# Allegro board MCF8316A_V10_211228.brd
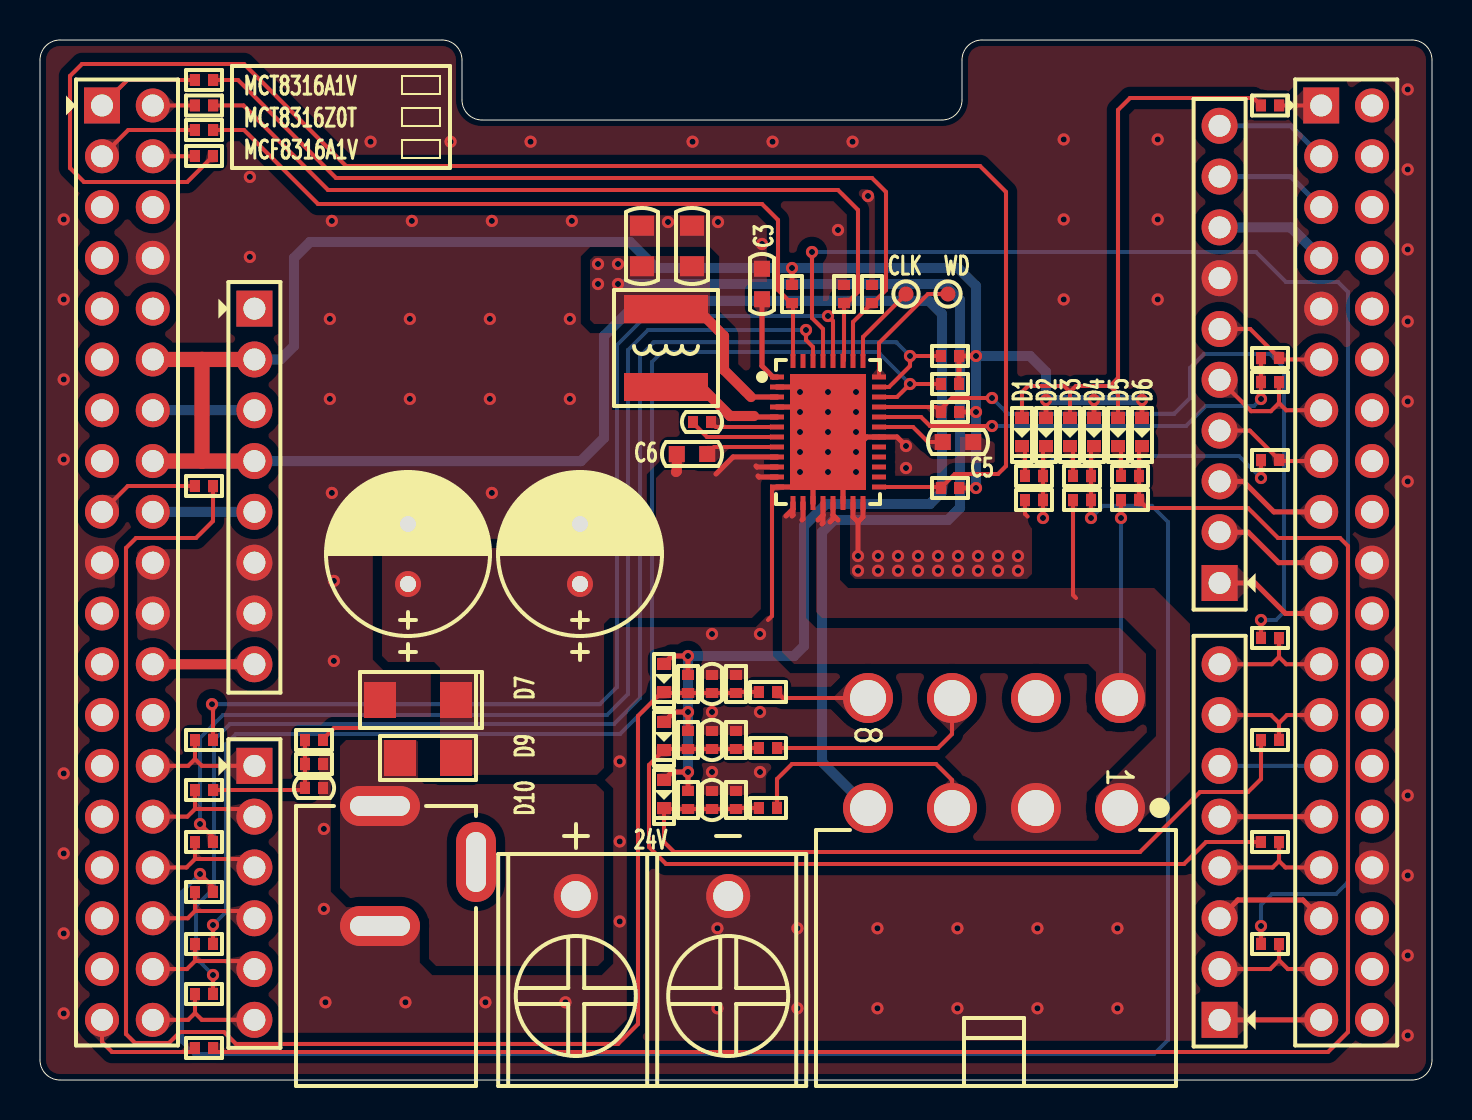
[diagram p0: board, top side]
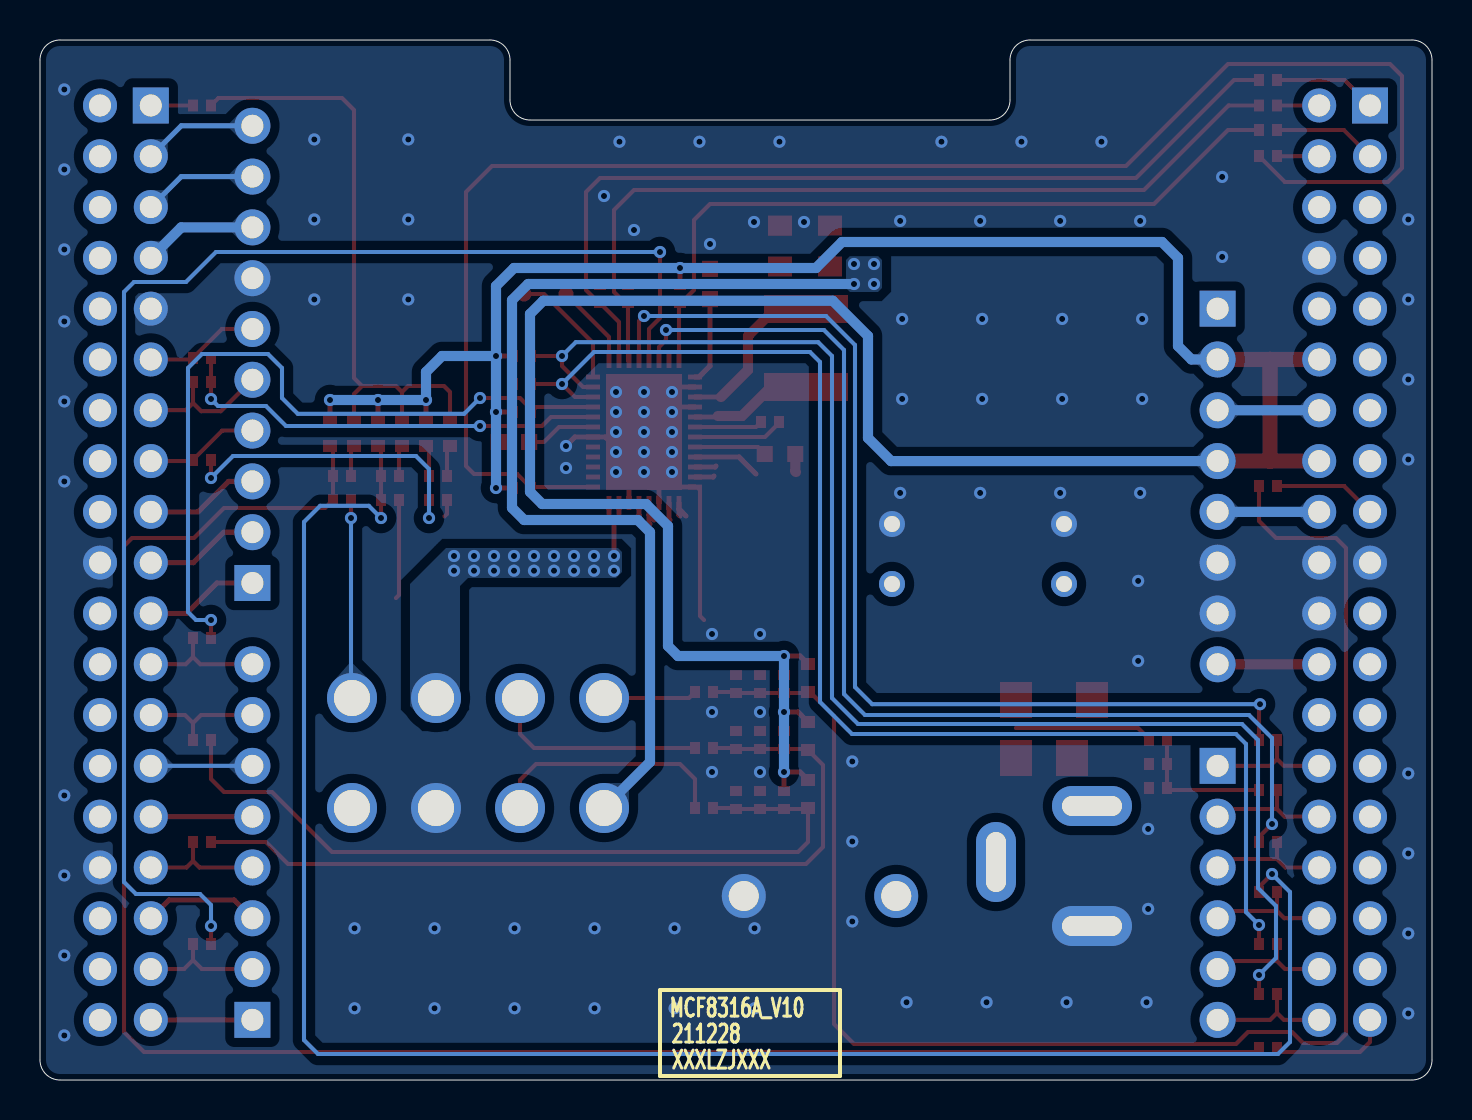
[diagram p1: board, bottom side, seen from below]

Outline 69.6 x 52 mm; copper layers: TOP, BOTTOM. Coordinates in mm from the lower left corner of the outline.
Outline path: 0,51 arc(0.29,51.71) 1,52 20.1,52 arc(20.81,51.71) 21.1,51 21.1,49 arc(21.39,48.29) 22.1,48 45.1,48 arc(45.81,48.29) 46.1,49 46.1,51 arc(46.39,51.71) 47.1,52 68.6,52 arc(69.31,51.71) 69.6,51 69.6,1 arc(69.31,0.29) 68.6,0 1,0 arc(0.29,0.29) 0,1 0,51

## Design rules (mm)
constraint set DEFAULT: min track width 0.203, pair gap 0.203

## Placement (name value [footprint] x y rotation side)
C1  10uF_25V  [C0805]  30.1 41.7 90 top
C2  10uF_25V  [C0805]  32.6 41.7 90 top
C3  1uF_50V  [C0603]  36.1 39.8 90 top
C4  47nF_50V  [C0402]  33.1 32.9 180 top
C5  1uF_50V  [C0603]  45.9 31.9 180 top
C6  1uF_50V  [C0603]  32.6 31.3 180 top
C7  100uF_50V  [CAP-3R0-8X12]  18.4 26.3 90 top
C8  100uF_50V  [CAP-3R0-8X12]  27 26.3 90 top
C9  10pF_50V  [C0402]  33.6 19.8 90 top
C10  10pF_50V  [C0402]  33.6 17 90 top
C11  10pF_50V  [C0402]  13.7 14.6 0 top
C12  10pF_50V  [C0402]  33.6 14 90 top
D1  LRB521S-40T1G  [SOD523]  49.1 32.4 90 top
D2  LRB521S-40T1G  [SOD523]  50.3 32.4 90 top
D3  LRB521S-40T1G  [SOD523]  51.5 32.4 90 top
D4  LRB521S-40T1G  [SOD523]  52.7 32.4 90 top
D5  LRB521S-40T1G  [SOD523]  53.9 32.4 90 top
D6  LRB521S-40T1G  [SOD523]  55.1 32.4 90 top
D7  LRB521S-40T1G  [SOD523]  31.2 20.1 90 top
D8  SS56F  [SMAF]  18.9 19 0 top
D9  LRB521S-40T1G  [SOD523]  31.2 17.2 90 top
D10  LRB521S-40T1G  [SOD523]  31.2 14.3 90 top
DC1  -  [DC005]  17 7.7 90 top
F1  0469005.WR  [FUSE1206]  19.4 16.1 0 top
J1  -  [CN1X10-2P54-Z]  58.98 24.85 90 top
J2  -  [CN1X8-2P54-Z]  10.72 38.57 270 top
J3  -  [CN2X19-2P54-Z]  3.1 48.73 270 top
J4  -  [CN2X19-2P54-Z]  64.06 48.73 270 top
J5  -  [CN1X8-2P54-Z]  58.98 3.01 90 top
J6  -  [CN1X6-2P54-Z]  10.72 15.71 270 top
J7  -  [HX42003-8WAF]  47.7 13.6 270 top
J8  KF7.62-2P  [KF7R62-2P]  30.6 9.2 180 top
L1  SWPA5020S470  [L5020]  31.3 36.6 270 top
NOREF  -  []  0 0 0 top
NOREF#2  -  []  0 0 90 top
R1  0R  [R0402]  8.2 50 180 top
R2  0R  [R0402]  8.2 48.73 180 top
R3  0R  [R0402]  61.5 48.73 0 top
R4  0R  [R0402]  8.2 47.5 180 top
R5  0R  [R0402]  8.2 46.2 180 top
R6  4.7K  [R0402]  37.6 39.3 270 top
R7  10K  [R0402]  40.2 39.3 90 top
R8  10K  [R0402]  41.6 39.3 90 top
R9  4.7K  [R0402]  45.5 36.2 180 top
R10  0R  [R0402]  61.5 36.1 0 top
R11  0R/NI  [R0402]  61.5 34.9 0 top
R12  4.7K  [R0402]  45.5 34.8 180 top
R13  4.7K  [R0402]  45.5 33.4 180 top
R14  0R  [R0402]  61.5 31 0 top
R15  2.2K  [R0402]  49.7 30.2 180 top
R16  2.2K  [R0402]  52.1 30.2 180 top
R17  2.2K  [R0402]  54.5 30.2 180 top
R18  0R  [R0402]  8.2 29.7 180 top
R19  4.7K  [R0402]  45.5 29.6 180 top
R20  10K  [R0402]  49.7 29 0 top
R21  10K  [R0402]  52.1 29 0 top
R22  10K  [R0402]  54.5 29 0 top
R23  0R  [R0402]  61.5 22.1 0 top
R24  10K  [R0402]  32.4 19.8 90 top
R25  4.7K/NI  [R0402]  34.8 19.8 270 top
R26  1.8K  [R0402]  36.4 19.4 180 top
R27  0R  [R0402]  8.2 17 180 top
R28  200K  [R0402]  13.7 17 0 top
R29  10K  [R0402]  32.4 17 90 top
R30  4.7K/NI  [R0402]  34.8 17 270 top
R31  0R  [R0402]  61.5 17 0 top
R32  1.8K  [R0402]  36.4 16.6 180 top
R33  10K  [R0402]  13.7 15.8 180 top
R34  0R  [R0402]  8.2 14.5 180 top
R35  10K  [R0402]  32.4 14 90 top
R36  4.7K/NI  [R0402]  34.8 14 270 top
R37  1.8K  [R0402]  36.4 13.6 180 top
R38  0R  [R0402]  8.2 11.9 180 top
R39  0R  [R0402]  61.5 11.9 0 top
R40  0R  [R0402]  8.2 9.4 180 top
R41  0R  [R0402]  8.2 6.8 180 top
R42  0R  [R0402]  61.5 6.8 0 top
R43  0R  [R0402]  8.2 4.3 180 top
R44  0R  [R0402]  8.2 1.6 180 top
TP1  TP/NI  [TP-0R75]  43.3 39.3 0 top
TP2  TP/NI  [TP-0R75]  45.4 39.3 0 top
U1  MCT8316A1VRGFR  [VQFN40-7R0X5R0X0R5-5R7X3R7]  39.4 32.4 0 top

## Library data of the parts
C1-C6 C9-C12 = CAP NP
C7 C8 = CAPT_100UF_3528_6r3V_10%_LXXXX
D1-D10 = DIODE13_9
DC1 = DC005
F1 = FUSE
J1 = CONN RCPT 10
J2 J5 = CONN RCPT 8
J3 J4 = CONN RCPT 19x2
J6 = CONN RCPT 6
J7 = HX30002-10A_1
J8 = CONN RCPT 2
L1 = INDUCTOR_0
R1-R44 = R_Generic
TP1 TP2 = TestPoint
U1 = MCT8316A1VRGFR

## Footprints (pads in the part's own frame, mm; a bottom-side part is the same pattern mirrored in y, then rotated)
C0402
  rect 0.5x0.6 smd: 1(-0.45,0) 2(0.45,0)
C0603
  rect 0.8x0.8 smd: 1(-0.762,0) 2(0.762,0)
C0805
  rect 1x1.2 smd: 1(-1.016,0) 2(1.016,0)
CAP-3R0-8X12
  round 1.3 hole 0.8: 1(-1.5,0) 2(1.5,0)
CN1X6-2P54-Z
  rect 1.8x1.8 hole 1.1: 1(0,0)
  round 1.8 hole 1.1: 2(2.54,0) 3(5.08,0) 4(7.62,0) 5(10.16,0) 6(12.7,0)
CN1X8-2P54-Z
  rect 1.8x1.8 hole 1.1: 1(0,0)
  round 1.8 hole 1.1: 2(2.54,0) 3(5.08,0) 4(7.62,0) 5(10.16,0) 6(12.7,0) 7(15.24,0) 8(17.78,0)
CN1X10-2P54-Z
  rect 1.8x1.8 hole 1.1: 1(0,0)
  round 1.8 hole 1.1: 2(2.54,0) 3(5.08,0) 4(7.62,0) 5(10.16,0) 6(12.7,0) 7(15.24,0) 8(17.78,0) 9(20.32,0) 10(22.86,0)
CN2X19-2P54-Z
  rect 1.8x1.8 hole 1.1: 1(0,0)
  round 1.7 hole 1.1: 2(0,2.54) 3(2.54,0) 4(2.54,2.54) 5(5.08,0) 6(5.08,2.54) 7(7.62,0) 8(7.62,2.54) 9(10.16,0) 10(10.16,2.54) 11(12.7,0) 12(12.7,2.54) 13(15.24,0) 14(15.24,2.54) 15(17.78,0) 16(17.78,2.54) 17(20.32,0) 18(20.32,2.54) 19(22.86,0) 20(22.86,2.54) 21(25.4,0) 22(25.4,2.54) 23(27.94,0) 24(27.94,2.54) 25(30.48,0) 26(30.48,2.54) 27(33.02,0) 28(33.02,2.54) 29(35.56,0) 30(35.56,2.54) 31(38.1,0) 32(38.1,2.54) 33(40.64,0) 34(40.64,2.54) 35(43.18,0) 36(43.18,2.54) 37(45.72,0) 38(45.72,2.54)
DC005
  oval 2x4 hole 1x3: 1(6,0) 2(0,0)
  oval 4x2 hole 3x1: 3(3.2,-4.8)
FUSE1206
  rect 1.6x1.8 smd: 1(-1.4,0) 2(1.4,0)
HX42003-8WAF
  round 2.5 hole 1.8: 1(0,6.3) 2(0,2.1) 3(0,-2.1) 4(0,-6.3) 5(-5.5,6.3) 6(-5.5,2.1) 7(-5.5,-2.1) 8(-5.5,-6.3)
KF7R62-2P
  round 2.2 hole 1.5: 1(-3.81,0) 2(3.81,0)
L5020
  rect 1.4x4.2 smd: 1(-1.95,0) 2(1.95,0)
R0402
  rect 0.5x0.6 smd: 1(-0.45,0) 2(0.45,0)
SMAF
  rect 1.6x1.8 smd: 1(-1.9,0) 2(1.9,0)
SOD523
  rect 0.6x0.7 smd: 1(-0.7,0) 2(0.7,0)
TP-0R75
  round 0.75 smd: 1(0,0)
VQFN40-7R0X5R0X0R5-5R7X3R7
  rect 0.7x0.25 smd: 1(-2.55,2.75) 2(-2.55,2.25) 3(-2.55,1.75) 4(-2.55,1.25) 5(-2.55,0.75) 6(-2.55,0.25) 7(-2.55,-0.25) 8(-2.55,-0.75) 9(-2.55,-1.25) 10(-2.55,-1.75) 11(-2.55,-2.25) 12(-2.55,-2.75) 21(2.55,-2.75) 22(2.55,-2.25) 23(2.55,-1.75) 24(2.55,-1.25) 25(2.55,-0.75) 26(2.55,-0.25) 27(2.55,0.25) 28(2.55,0.75) 29(2.55,1.25) 30(2.55,1.75) 31(2.55,2.25) 32(2.55,2.75)
  rect 0.25x0.7 smd: 13(-1.75,-3.55) 14(-1.25,-3.55) 15(-0.75,-3.55) 16(-0.25,-3.55) 17(0.25,-3.55) 18(0.75,-3.55) 19(1.25,-3.55) 20(1.75,-3.55) 33(1.75,3.55) 34(1.25,3.55) 35(0.75,3.55) 36(0.25,3.55) 37(-0.25,3.55) 38(-0.75,3.55) 39(-1.25,3.55) 40(-1.75,3.55)
  rect 3.8x5.8 smd: 41(0,0)

## Nets
+5V: J2.5 J3.18
AVDD: J1.8 J4.7
GND: C1.2 C2.2 C3.2 C5.1 C7.2 C8.2 C9.2 C10.2 C11.2 C12.2 D8.1 DC1.2 J1.7 J2.6 J2.7 J3.8 J3.19 J3.20 J3.22 J4.9 J4.20 J4.32 J7.2 J8.1 R7.2 R8.2 R25.1 R30.1 R33.1 R36.1 U1.2 U1.4 U1.12 U1.15 U1.18 U1.26 U1.41
VBUS: C11.1 R28.1 R33.2 R34.1
VCC_1.5V_DVDD: C3.1 U1.1
VCC_3.3V: D2.2(ANODE_2) D4.2(ANODE_2) D6.2(ANODE_2) D7.2(ANODE_2) D9.2(ANODE_2) D10.2(ANODE_2) J2.2 J2.4 J3.12 J3.16 R6.1 R9.1 R12.1 R13.1 R19.1 R24.2 R29.2 R35.2
VCC_3.3V_AVDD: C5.2 U1.27
VCC_5V_BK: C1.1 C2.1 J7.4 L1.1 U1.3
VCC_24V: C6.2 C7.1 C8.1 D8.2(ANODE_2) F1.2 R28.2 U1.9 U1.10 U1.11(VM_3)
VCC_24V_IN: DC1.1 F1.1 J8.2
VDD: J3.5
VIN: J2.8 J3.24
BEMF1: D6.1 R17.1 R22.2 R44.1
BEMF2: D4.1 R16.1 R21.2 R40.1
BEMF3: D2.1 R14.1 R15.1 R20.2
BOOT0: J3.7
BRAKE: R2.1 R7.1 U1.35
DACOUT1: R42.1 U1.37
DACOUT2: R38.1 U1.38
DACOUT2/SOX: R27.1 U1.36
DIR: R1.1 R8.1 U1.34
DRVOFF: R5.1 R19.2 U1.21
E5V: J3.6
EXT_CLK: TP1.1 U1.33
EXT_WD: TP2.1 U1.32
FG: R13.2 R23.1 U1.29
GPIO_BEMF: D1.2(ANODE_2) D3.2(ANODE_2) D5.2(ANODE_2) R3.1
H1: J7.8 R26.1
H2: J7.7 R32.1
H3: J7.3 R37.1
HALL_H1: C9.1 D7.1 R18.1 R24.1 R25.2 R26.2
HALL_H2: C10.1 D9.1 R29.1 R30.2 R32.2 R39.1
HALL_H3: C12.1 D10.1 R31.1 R35.1 R36.2 R37.2
MOTOR_U: J7.5 R22.1 U1.13 U1.14
MOTOR_V: J7.1 R21.1 U1.16 U1.17
MOTOR_W: J7.6 R20.1 U1.19 U1.20
NFAULT: R4.1 R6.2 U1.40
NRST: J2.3 J3.14
PA0: J3.28 J6.1 R27.2
PA1: J3.30 J6.2 R34.2
PA2: J4.35 J5.2 R42.2
PA3: J4.37 J5.1
PA4: J3.32 J6.3 R38.2
PA5: J1.6 J4.11 R10.2
PA6: J1.5 J4.13 R11.2
PA7: J1.4 J4.15 R14.2
PA8: J4.23 J5.8 R23.2
PA9: J1.1 J4.21
PA10: J4.33 J5.3
PA11: J4.14
PA12: J4.12
PA13: J3.13
PA14: J3.15
PA15: J3.17 R18.2
PB0: J3.34 J6.4 R40.2
PB1: J4.24
PB2: J4.22
PB3: J4.31 J5.4 R39.2
PB4: J4.27 J5.6
PB5: J4.29 J5.5
PB6: J1.3 J4.17
PB7: J3.21
PB8: J1.10 J4.3
PB9: J1.9 J4.5
PB10: J4.25 J5.7 R31.2
PB11: J4.18
PB12: J4.16
PB13: J4.30
PB14: J4.28
PB15: J4.26
PC0: J3.38 J6.6 R43.2
PC1: J3.36 J6.5 R41.2
PC2: J3.35
PC3: J3.37 R44.2
PC4: J4.34
PC5: J4.6
PC6: J4.4
PC7: J1.2 J4.19
PC8: J4.2
PC9: J4.1 R3.2
PC10: J3.1 R1.2
PC11: J3.2 R2.2
PC12: J3.3 R4.2
PC13: J3.23
PC14: J3.25
PC15: J3.27
PD2: J3.4 R5.2
PD8: J4.10
PF0: J3.29
PF1: J3.31
PF4: J4.38
PF5: J4.36
PF6: J3.9
PF7: J3.11
SCL: R9.2 R43.1 U1.31
SDA: R12.2 R41.1 U1.30
SPEED: R10.1 R11.1 U1.28
U5V: J4.8
VBAT/VLCD: J3.33
N17269667: C4.1 U1.6
N17269670: C4.2 U1.7
N17269727: C6.1 U1.8
N17270277: L1.2 U1.5
N17281076: D5.1 R17.2
N17281273: D3.1 R16.2
N17281452: D1.1 R15.2

Pads without a net: DC1 3; J2 1; J3 10 26; U1 22 23 24 25 39

## Via types
v1: diameter 0.61, hole 0.305, TOP to BOTTOM, 150 vias

## Routing (per net, layer and track width the routed paths; a pad name or vN(x,y) marks a point on that pad's centre or on a via; arc(x,y) is an arc through that point)
+5V: length 5.1
  BOTTOM w0.508: J3.18 J2.5
AVDD: length 5.7
  BOTTOM w0.508: J4.7 62.54,42.63 J1.8
GND: length 28.1
  TOP w0.203: 36.4,23 36.6,23.2 36.6,29.5 36.75,29.65 U1.12
  TOP w0.254: 39.65,32.15 40.15,31.65 U1.18 ; 39.65,32.15 v1(39.4,32.4) ; 39.65,32.15 40.26,32.15 40.57,31.84 41.03,31.84 41.34,32.15 U1.26 42.85,32.15 v1(43.3,31.7) ; U1.12 37.75,29.65 38.65,30.55 ; 38.65,30.55 U1.15 ; 38.65,30.55 38.65,31.65 v1(39.4,32.4) ; v1(39.4,32.4) 38.15,33.65 U1.4 ; v1(39.4,32.4) v1(39.4,33.4) 39.4,33.6 38.35,34.65 U1.2
  vias: v1(1.19,43.03) v1(1.19,39.03) v1(1.19,35.03) v1(1.19,31.03) v1(1.19,15.33) v1(1.19,11.33) v1(1.19,7.33) v1(1.19,3.33) v1(10.49,45.15) v1(10.49,41.15) v1(14.19,12.55) v1(14.19,8.55) v1(14.27,3.89) v1(14.49,38.05) v1(14.49,34.05) v1(14.59,42.95) v1(14.59,29.35) v1(14.69,24.95) v1(14.69,20.95) v1(16.53,46.91) v1(18.27,3.89) v1(18.49,38.05) v1(18.49,34.05) v1(18.59,42.95) v1(18.59,29.35) v1(20.53,46.91) v1(22.27,3.89) v1(22.49,38.05) v1(22.49,34.05) v1(22.59,42.95) v1(22.59,29.35) v1(24.53,46.91) v1(26.27,3.89) v1(26.49,38.05) v1(26.49,34.05) v1(26.59,42.95) v1(26.59,29.35) v1(28.99,15.93) v1(28.99,11.93) v1(28.99,7.93) v1(31.4,42.9) v1(32.63,46.91) v1(33.6,22.3) v1(33.6,18.4) v1(33.6,15.4) v1(33.9,42.9) v1(33.87,7.59) v1(33.87,3.59) v1(36,22.3) v1(36,18.4) v1(36,15.4) v1(36.1,41.8) v1(36.63,46.91) v1(37.87,7.59) v1(37.87,3.59) v1(38,34.4) v1(38,33.4) v1(38,32.4) v1(38,31.4) v1(38,30.4) v1(39.4,34.4) v1(39.4,31.4) v1(39.4,30.4) v1(39.9,42.5) v1(40.63,46.91) v1(40.8,34.4) v1(40.8,33.4) v1(40.8,32.4) v1(40.8,31.4) v1(40.8,30.4) v1(41.4,44.2) v1(41.87,7.59) v1(41.87,3.59) v1(43.3,30.6) v1(45.87,7.59) v1(45.87,3.59) v1(49.87,7.59) v1(49.87,3.59) v1(51.19,47.03) v1(51.19,43.03) v1(51.19,39.03) v1(53.87,7.59) v1(53.87,3.59) v1(55.89,47.03) v1(55.89,43.03) v1(55.89,39.03) v1(68.39,49.53) v1(68.39,45.53) v1(68.39,41.53) v1(68.39,37.93) v1(68.39,33.93) v1(68.39,29.93) v1(68.39,14.23) v1(68.39,10.23) v1(68.39,6.23) v1(68.39,2.23)
VBUS: length 7
  TOP w0.203: R28.1 R33.2 C11.1 13.15,14.5 R34.1
VCC_1.5V_DVDD: length 4.3
  TOP w0.254: U1.1 36.65,35.15 36.1,35.7 C3.1
VCC_3.3V: length 167.1
  TOP w0.254: R35.2 v1(32.4,15.4) 31.6,15.4 D10.2 ; v1(46.8,36.2) R9.1 R12.1 ; R29.2 v1(32.4,18.4) 31.7,18.4 D9.2 ; R19.1 v1(46.8,29.6) ; D2.2 v1(50.3,34) ; D6.2 v1(55.1,34) ; D4.2 v1(52.7,34) ; R13.1 v1(46.8,33.4) ; R24.2 v1(32.4,21.2) 31.6,21.2 D7.2 ; R6.1 v1(37.6,40.6)
  TOP w0.762: J3.12 8.1,36.03 ; 8.1,36.03 J2.2 ; 8.1,36.03 8.1,30.95 ; 8.1,30.95 J2.4 ; 8.1,30.95 J3.16
  BOTTOM w0.508: v1(46.8,36.2) 49.5,36.2 50.3,35.4 v1(50.3,34) v1(52.7,34) v1(55.1,34) ; v1(46.8,36.2) v1(46.8,33.4) v1(46.8,29.6) ; v1(46.8,36.2) 46.8,39.7 45.9,40.6 v1(37.6,40.6) 30.8,40.6 29.5,41.9 13.5,41.9 12.7,41.1 12.7,36.7 12.03,36.03 J2.2 ; v1(32.4,15.4) v1(32.4,18.4) v1(32.4,21.2) 37.7,21.2 38.2,21.7 38.2,27.7 39.3,28.8 44.49,28.8 45.1,29.41 45.1,38.3 44.44,38.96 29.96,38.96 28.2,37.2 28.2,32.1 27.05,30.95 J2.4
VCC_3.3V_AVDD: length 3.5
  TOP w0.203: C5.2 44.4,31.9 43.65,32.65 U1.27
VCC_5V_BK: length 58.3
  TOP w0.254: U1.3 35.55,34.15
  TOP w0.508: 35.55,34.15 34.2,35.5 34.2,37.2 32.9,38.5 31.35,38.5 L1.1
  BOTTOM w0.508: J7.4 39.1,15.9 39.1,27.39 39.71,28 45.39,28 46,28.61 46,38.99 45.19,39.8 v1(28.9,39.8)
  vias: v1(27.9,40.8) v1(27.9,39.8) v1(28.9,40.8)
VCC_24V: length 13.3
  TOP w0.203: 20.8,17.6 14.7,17.6 14.15,17.05 R28.2
  TOP w0.254: 35.9,30.2 35.95,30.15 U1.11 ; 35.8,30.7 35.85,30.65 U1.10 ; 33.8,30.3 34.65,31.15 U1.9
  TOP w0.508: C6.2 31.84,30.44 31.8,30.4
VIN: length 5.1
  TOP w0.508: J2.8 J3.24
BEMF1: length 95.7
  TOP w0.203: R44.1 8.85,1.4 64.4,1.4 65.4,2.4 65.4,26.7 65,27.1 61.9,27.1 60.4,28.6 55.35,28.6 R22.2 R17.1 54.95,31.55 D6.1
BEMF2: length 93.8
  TOP w0.203: v1(8,10.3) 8.65,9.65 R40.1 ; v1(52.55,28.1) R21.2 R16.1 52.55,31.55 D4.1
  BOTTOM w0.203: v1(8,10.3) 7.1,9.4 7.1,1.9 7.7,1.3 55.7,1.3 56.4,2 56.4,27.9 55.59,28.71 53.16,28.71 v1(52.55,28.1)
BEMF3: length 18.6
  TOP w0.203: v1(50.15,28.1) R20.2 R15.1 50.15,31.55 D2.1 ; R14.1 v1(61.05,30.1)
  BOTTOM w0.203: v1(50.15,28.1) 50.15,30.55 50.8,31.2 59.95,31.2 v1(61.05,30.1)
BRAKE: length 42.4
  TOP w0.203: R2.1 10.17,48.73 14.4,44.5 39.9,44.5 40.9,43.5 40.9,39.4 40.35,38.85 R7.1 40.2,36 U1.35
DACOUT1: length 69.6
  TOP w0.203: v1(38.6,41.4) 38.6,38.1 39.15,37.55 U1.37 ; R42.1 v1(61.05,7.7)
  BOTTOM w0.203: v1(38.6,41.4) 60.8,41.4 62.3,39.9 64.9,39.9 65.4,39.4 65.4,9.9 64.8,9.3 61.6,9.3 61.05,8.75 v1(61.05,7.7)
DACOUT2: length 56
  TOP w0.203: U1.38 38.65,36.65 38.3,37 v1(38.3,37.5) ; R38.1 8.65,12.15 v1(8,12.8)
  BOTTOM w0.203: v1(8,12.8) 8,17.1 9.15,18.25 28.35,18.25 29.4,19.3 29.4,36.5 30.4,37.5 v1(38.3,37.5)
DACOUT2/SOX: length 53
  TOP w0.203: U1.36 39.65,37.95 v1(39.4,38.2) ; R27.1 8.65,18.74 v1(8.6,18.79)
  BOTTOM w0.203: v1(39.4,38.2) 30.3,38.2 28.85,36.75 28.85,19.65 27.99,18.79 v1(8.6,18.79)
DIR: length 45.1
  TOP w0.203: U1.34 40.65,37.9 R8.1 41.65,38.85 42.3,39.5 42.3,44.4 41.6,45.1 14.8,45.1 9.9,50 R1.1
DRVOFF: length 82.8
  TOP w0.203: U1.21 45,29.65 R19.2 45.05,29.61 45.74,30.3 47.9,30.3 48.3,30.7 48.3,44.4 47,45.7 15.3,45.7 10.2,50.8 2.1,50.8 1.5,50.2 1.5,45.6 2.2,44.9 7.36,44.9 8.65,46.19 R5.1
EXT_CLK: length 4.2
  TOP w0.203: U1.33 41.15,37.15 TP1.1
EXT_WD: length 6.2
  TOP w0.203: U1.32 41.95,36.85 44.4,39.3 TP2.1
FG: length 37.9
  TOP w0.203: v1(47.6,34.1) 45.6,34.1 45.05,33.55 R13.2 44.8,33.65 U1.29 ; R23.1 v1(61.05,23)
  BOTTOM w0.203: v1(61.05,23) 61.8,23 62.2,23.4 62.2,35.6 61.5,36.3 58.2,36.3 57.5,35.6 57.5,34.1 56.71,33.31 48.39,33.31 v1(47.6,34.1)
GPIO_BEMF: length 30.7
  TOP w0.203: 53.5,34.7 51.8,34.7 51.5,34.4 ; 53.5,34.7 53.9,35.1 53.9,48.5 54.5,49.1 60.68,49.1 R3.1 ; 53.5,34.7 53.9,34.3 D5.2 ; D3.2 51.5,34.4 ; 51.5,34.4 51.2,34.7 49.4,34.7 49.1,34.4 D1.2
H1: length 4.7
  TOP w0.203: R26.1 37.15,19.1 J7.8
H2: length 10.8
  TOP w0.203: R32.1 44.9,16.6 45.6,17.3 J7.7
H3: length 12.2
  TOP w0.203: R37.1 36.85,15.05 37.6,15.8 44.8,15.8 45.6,15 J7.3
HALL_H1: length 79.6
  TOP w0.203: R26.2 34.85,19.4 R25.2 C9.1 R24.1 31.25,19.35 D7.1 31.1,19.4 29.9,18.2 29.9,2.8 28.9,1.8 9.8,1.8 9.2,2.4 7,2.4 6.45,1.85 4.75,1.85 4.3,2.3 4.3,26.6 4.8,27.1 7.8,27.1 8.65,27.95 R18.1
HALL_H2: length 41.4
  TOP w0.203: R39.1 58.3,11.9 57.2,10.8 31.3,10.8 30.45,11.65 30.45,15.75 D9.1 31.25,16.55 R29.1 C10.1 R30.2 34.85,16.6 R32.2
HALL_H3: length 40
  TOP w0.203: R37.2 34.85,13.6 R36.2 C12.1 R35.1 31.25,13.55 D10.1 31.2,11.9 31.7,11.4 55,11.4 58,14.4 60.4,14.4 61.05,15.05 R31.1
MOTOR_U: length 12
  TOP w0.203: R22.1 v1(54.05,28.1)
  TOP w0.254: U1.13 37.65,28.55 ; 37.65,28.55 37.3,28.2 ; 37.65,28.55 37.65,28.25 37.6,28.2 ; U1.14 38.15,28.05 38.1,28
  BOTTOM w0.203: v1(54.05,28.1) 54.05,19.15 J7.5
MOTOR_V: length 7.8
  TOP w0.203: 51.8,24.1 51.65,24.25 R21.1
  TOP w0.254: 39.1,27.8 39.15,27.85 39.15,28.25 ; U1.17 39.65,28.25 ; 39.65,28.25 39.65,28.05 39.5,27.9 ; 39.65,28.25 39.9,28 ; 39.15,28.25 38.9,28 ; 39.15,28.25 U1.16
MOTOR_W: length 4.7
  TOP w0.203: 49.38,28.18 49.25,28.3 R20.1
  TOP w0.254: v1(40.9,26.2) 40.9,27.9 ; 40.9,27.9 40.65,28.15 U1.19 ; 40.9,27.9 41.15,28.15 U1.20
  vias: v1(40.9,25.46) v1(41.9,26.2) v1(41.9,25.46) v1(42.9,26.2) v1(42.9,25.46) v1(43.9,26.2) v1(43.9,25.46) v1(44.9,26.2) v1(44.9,25.46) v1(45.9,26.2) v1(45.9,25.46) v1(46.9,26.2) v1(46.9,25.46) v1(47.9,26.2) v1(47.9,25.46) v1(48.9,26.2) v1(48.9,25.46)
NFAULT: length 37.5
  TOP w0.203: U1.40 37.65,38.8 R6.2 37.55,38.85 36.9,39.5 36.9,43 36.1,43.8 13.9,43.8 10.2,47.5 R4.1
NRST: length 5.1
  BOTTOM w0.508: J2.3 J3.14
PA0: length 6.3
  TOP w0.203: 7.75,16.05 7.41,15.71 J3.28 ; 7.75,16.05 R27.2 ; 7.75,16.05 8.09,15.71 J6.1
PA1: length 6.3
  TOP w0.203: 7.75,13.55 10.34,13.55 J6.2 ; 7.75,13.55 7.37,13.17 J3.30 ; 7.75,13.55 R34.2
PA2: length 6.3
  TOP w0.203: J4.35 62.39,5.55 61.95,5.99 ; 61.95,5.99 61.51,5.55 J5.2 ; 61.95,5.99 R42.2
PA3: length 5.1
  TOP w0.254: J5.1 J4.37
PA4: length 6.3
  TOP w0.203: 7.75,11.05 10.35,11.05 10.72,10.68 J6.3 ; 7.75,11.05 7.33,10.63 J3.32 ; 7.75,11.05 R38.2
PA5: length 5.7
  TOP w0.203: J1.6 60.51,37.55 61.95,36.11 R10.2 62.02,36.03 J4.11
PA6: length 7.1
  TOP w0.203: J1.5 58.99,35.01 60.56,33.44 61.54,33.44 61.95,33.85 ; 61.95,33.85 R11.2 ; 61.95,33.85 62.31,33.49 J4.13
PA7: length 5.7
  TOP w0.203: J1.4 60.49,32.47 61.95,31.01 R14.2 62,30.95 J4.15
PA8: length 6.3
  TOP w0.203: 61.95,21.15 61.59,20.79 J5.8 ; 61.95,21.15 R23.2 ; 61.95,21.15 62.31,20.79 J4.23
PA9: length 5.7
  TOP w0.254: J1.1 60.75,24.85 62.27,23.33 J4.21
PA10: length 5.8
  TOP w0.254: J5.3 59.89,9 63.15,9 J4.33
PA15: length 5.2
  TOP w0.203: R18.2 4.39,29.7 J3.17
PB0: length 6.3
  TOP w0.203: 7.75,8.45 R40.2 ; 7.75,8.45 7.39,8.09 J3.34 ; 7.75,8.45 10.36,8.45 J6.4
PB3: length 6.3
  TOP w0.203: J5.4 61.63,10.63 61.95,10.95 ; J4.31 62.27,10.63 61.95,10.95 ; 61.95,10.95 R39.2
PB4: length 5.1
  BOTTOM w0.203: J5.6 J4.27
PB5: length 5.1
  TOP w0.254: J5.5 J4.29
PB6: length 5.7
  TOP w0.254: J1.3 60.17,29.93 61.69,28.41 J4.17
PB8: length 5.7
  BOTTOM w0.254: J1.10 62.54,47.71 J4.3
PB9: length 5.7
  BOTTOM w0.254: J1.9 62.54,45.17 J4.5
PB10: length 6.3
  TOP w0.203: 61.95,17.85 62.35,18.25 J4.25 ; 61.95,17.85 61.55,18.25 J5.7 ; 61.95,17.85 R31.2
PC0: length 6.3
  TOP w0.203: J6.6 8.09,3.01 7.75,3.35 ; J3.38 7.41,3.01 7.75,3.35 ; 7.75,3.35 R43.2
PC1: length 6.3
  TOP w0.203: 7.75,5.95 7.35,5.55 J3.36 ; 7.75,5.95 10.32,5.95 J6.5 ; 7.75,5.95 R41.2
PC3: length 6
  TOP w0.203: R44.2 7.55,1.4 3.6,1.4 3.1,1.9 J3.37
PC7: length 5.7
  TOP w0.254: J1.2 60.41,27.39 61.93,25.87 J4.19
PC9: length 2.1
  TOP w0.203: R3.2 J4.1
PC10: length 5.2
  TOP w0.203: J3.1 4.37,50 R1.2
PC11: length 2.1
  TOP w0.203: R2.2 J3.2
PC12: length 5.2
  TOP w0.203: R4.2 4.41,47.5 J3.3
PD2: length 2.1
  TOP w0.203: R5.2 7.74,46.19 J3.4
SCL: length 70.8
  TOP w0.203: R9.2 v1(43.5,36.2) 43.5,35.7 42.45,34.65 U1.31 ; R43.1 v1(8.65,5.25)
  BOTTOM w0.203: v1(8.65,5.25) 7.8,6.1 7.8,8.7 8.7,9.6 8.7,17 9.5,17.8 28.7,17.8 30,19.1 30,36.2 30.69,36.89 42.81,36.89 v1(43.5,36.2)
SDA: length 66.6
  TOP w0.203: U1.30 42.85,34.15 v1(43.5,34.8) R12.2 ; R41.1 v1(8.65,7.75)
  BOTTOM w0.203: v1(43.5,34.8) 41.9,36.4 31.1,36.4 30.6,35.9 30.6,18.9 29,17.3 9.8,17.3 9.3,16.8 9.3,8.4 v1(8.65,7.75)
SPEED: length 21.9
  TOP w0.203: U1.28 44.05,33.15 44.5,32.7 v1(47.6,32.7) ; v1(61.05,34.05) R11.1 R10.1
  BOTTOM w0.203: v1(61.05,34.05) 60.7,33.7 58.3,33.7 57.3,32.7 v1(47.6,32.7)
N17269667: length 3.4
  TOP w0.203: C4.1 33.8,32.65 U1.6
N17269670: length 4.5
  TOP w0.203: U1.7 33.35,32.15 32.65,32.85 C4.2
N17269727: length 3.6
  TOP w0.203: U1.8 33.71,31.65 C6.1
N17270277: length 6.2
  TOP w0.254: U1.5 35.75,33.15 35.7,33.2
  TOP w0.508: L1.2 33.05,34.65 34.5,33.2 35.7,33.2
N17281076: length 1.6
  TOP w0.203: R17.2 54.05,31.55 D5.1
N17281273: length 1.6
  TOP w0.203: D3.1 51.65,31.55 R16.2
N17281452: length 1.6
  TOP w0.203: R15.2 49.25,31.55 D1.1

## Copper pours and planes (outline as drawn; the poured copper is in the pictures)
GND on TOP: 69.3,1 69.09,0.51 68.6,0.3 1,0.3 0.51,0.51 0.3,1 0.3,51 0.51,51.49 1,51.7 20.1,51.7 20.59,51.49 20.8,51 20.8,49 21.18,48.08 22.1,47.7 45.1,47.7 46.02,48.08 46.4,49 46.4,51 46.61,51.49 47.1,51.7 68.6,51.7 69.09,51.49 69.3,51 ; 49 cut-outs
GND on BOTTOM: 69.3,1 69.09,0.51 68.6,0.3 1,0.3 0.51,0.51 0.3,1 0.3,51 0.51,51.49 1,51.7 20.1,51.7 20.59,51.49 20.8,51 20.8,49 21.18,48.08 22.1,47.7 45.1,47.7 46.02,48.08 46.4,49 46.4,51 46.61,51.49 47.1,51.7 68.6,51.7 69.09,51.49 69.3,51 ; 35 cut-outs
VCC_5V_BK on TOP: 33.5,37.8 33.5,41 33.3,41.2 27.7,41.2 27.5,41 27.5,38 27.7,37.8
VCC_5V_BK on BOTTOM: 27.7,41.2 29.1,41.2 29.3,41 29.3,39.6 29.1,39.4 27.7,39.4 27.5,39.6 27.5,41
VCC_24V on TOP: 20,15.2 20,20.6 19.7,20.9 17.4,20.9 17.1,21.2 17.1,26.3 17.4,26.6 30.2,26.6 30.8,27.2 30.8,30.1 31.2,30.5 33.8,30.5 34.6,31.3 36.2,31.3 36.2,23.7 35.6,23.1 28.5,23.1 28.2,22.8 28.2,15.6 27.8,15.2
VCC_24V_IN on TOP: 15,9.6 15,16.7 15.3,17 18.8,17 18.9,16.9 18.9,15.1 19.2,14.8 27.8,14.8 28.2,14.4 28.2,6 27.9,5.7 19.8,5.7 19.45,6.05 19.45,8.05 18.4,9.1 15.5,9.1
MOTOR_U on TOP: 38.3,28.4 37.3,28.4 37.1,28.2 37.1,21.4 37.7,20.8 52.4,20.8 52.8,20.4 52.8,18.6 53.5,17.9 54.5,17.9 55.3,18.7 55.3,21.3 54,22.6 38.8,22.6 38.3,23.1
MOTOR_V on TOP: 55.8,21.5 55.8,17.2 52.8,14.2 52.8,13.2 53.6,12.4 54.5,12.4 57.5,15.4 57.5,22.8 55.7,24.6 40.4,24.6 40,25 40,28.2 39.8,28.4 39,28.4 38.8,28.2 38.8,23.4 39.1,23.1 54.2,23.1
MOTOR_W on TOP: 40.5,28.4 49.4,28.4 49.6,28.2 49.6,25.3 49.3,25 40.8,25 40.5,25.3
MOTOR_W on BOTTOM: 51.1,18.7 51.1,24.8 49.3,26.6 40.7,26.6 40.5,26.4 40.5,25.4 40.8,25.1 48.2,25.1 48.6,24.7 48.6,18.7 49.4,17.9 50.3,17.9

Small or netless copper shapes (teardrops, artwork), in the pictures only: 247 on TOP, 35 on BOTTOM

## Text on the board
Ref Des/Silkscreen Bottom: 211228 | XXXLZJXXX | MCF8316A_V10
Ref Des/Silkscreen Top: MCT8316A1V | MCT8316Z0T | MCF8316A1V | 24V | CLK | WD
DIMENSION: FIGURE | FINISHED_SIZE | 0.3048 | 0.8 | 1.1 | 1.5 | 1.8 | 3.0x1.0 | DRILL CHART: TOP to BOTTOM | ALL UNITS ARE IN MILLIMETERS | ROTATION | - | 0.000 | 90.000 | PLATED | QTY | 150 | 4 | 108 | 2 | 8 | 1 | 275 | TOTAL HOLES:
